# Allegro board LT8619C_HDMI_to_RGB_HV2_3.brd
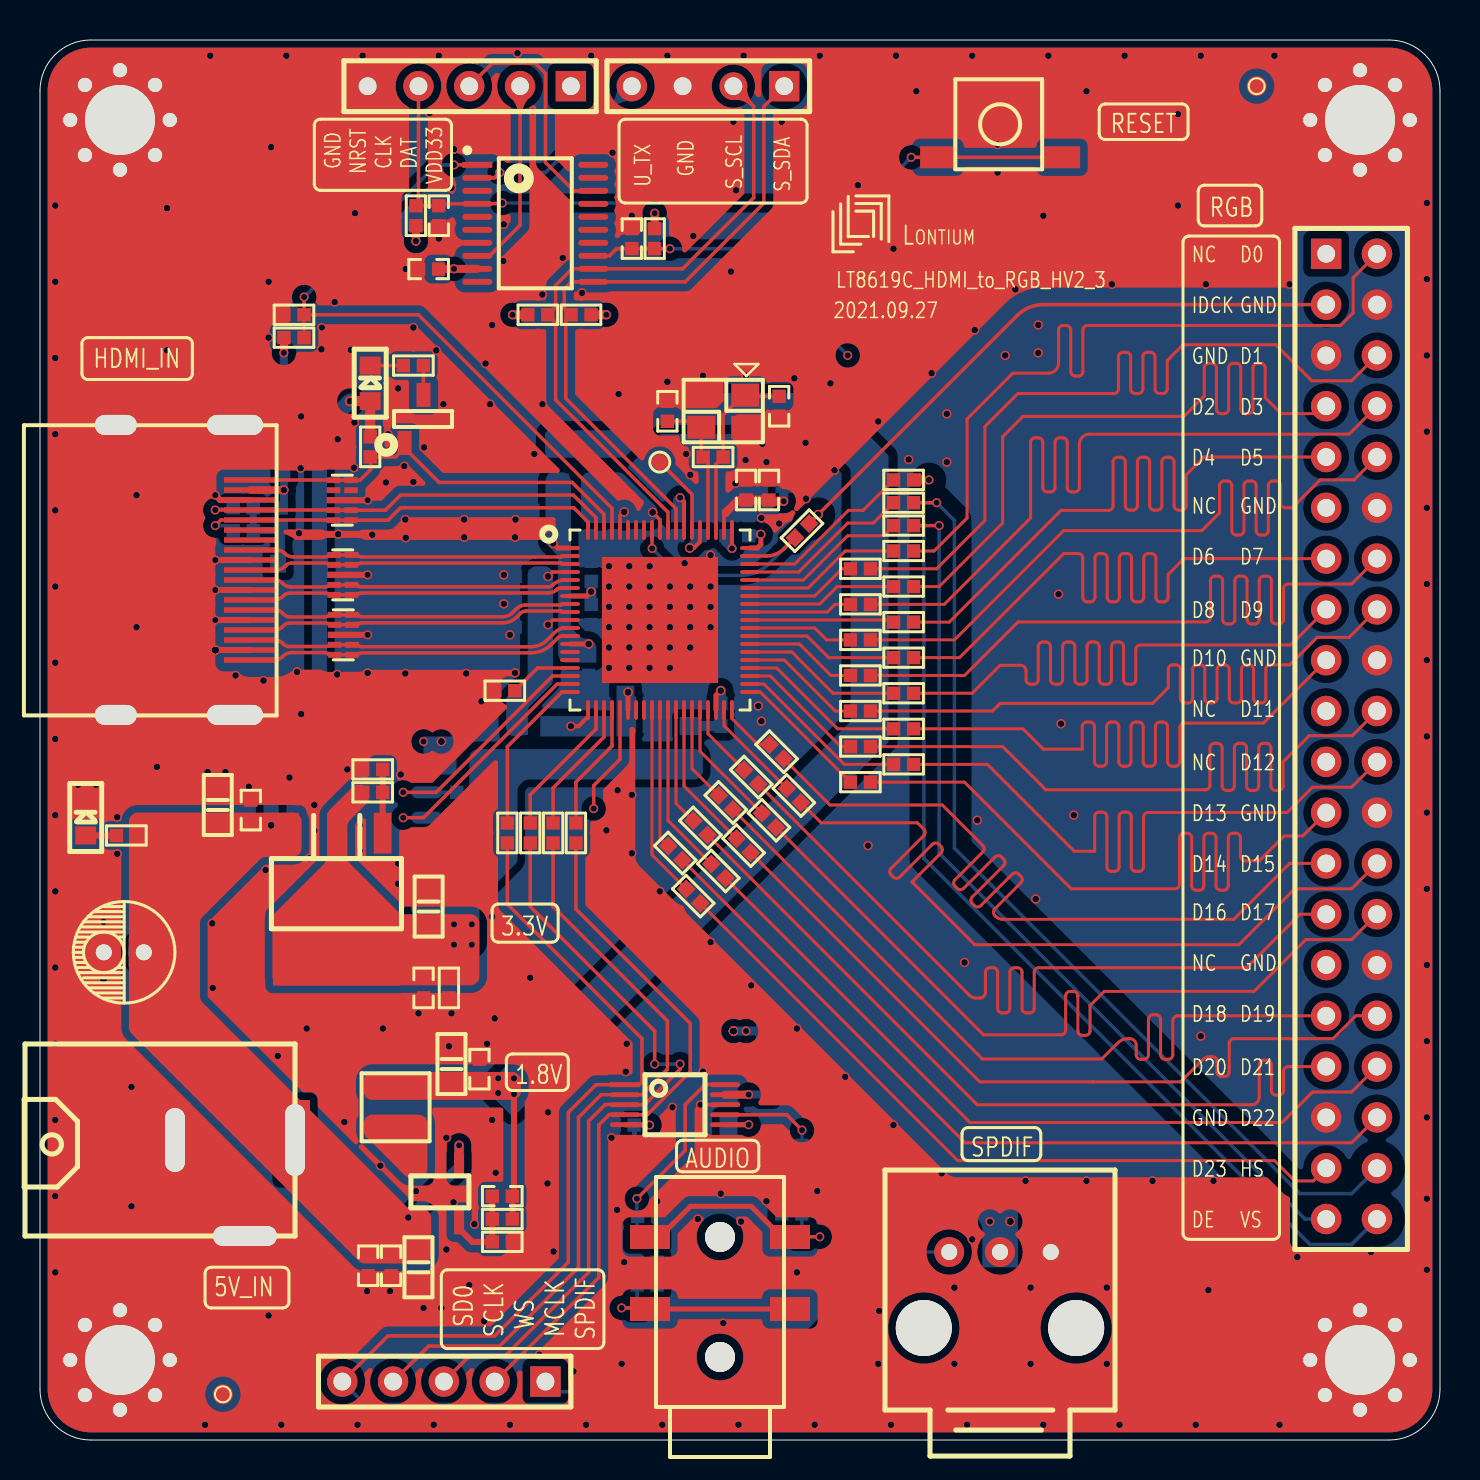
[diagram p0: board, top side]
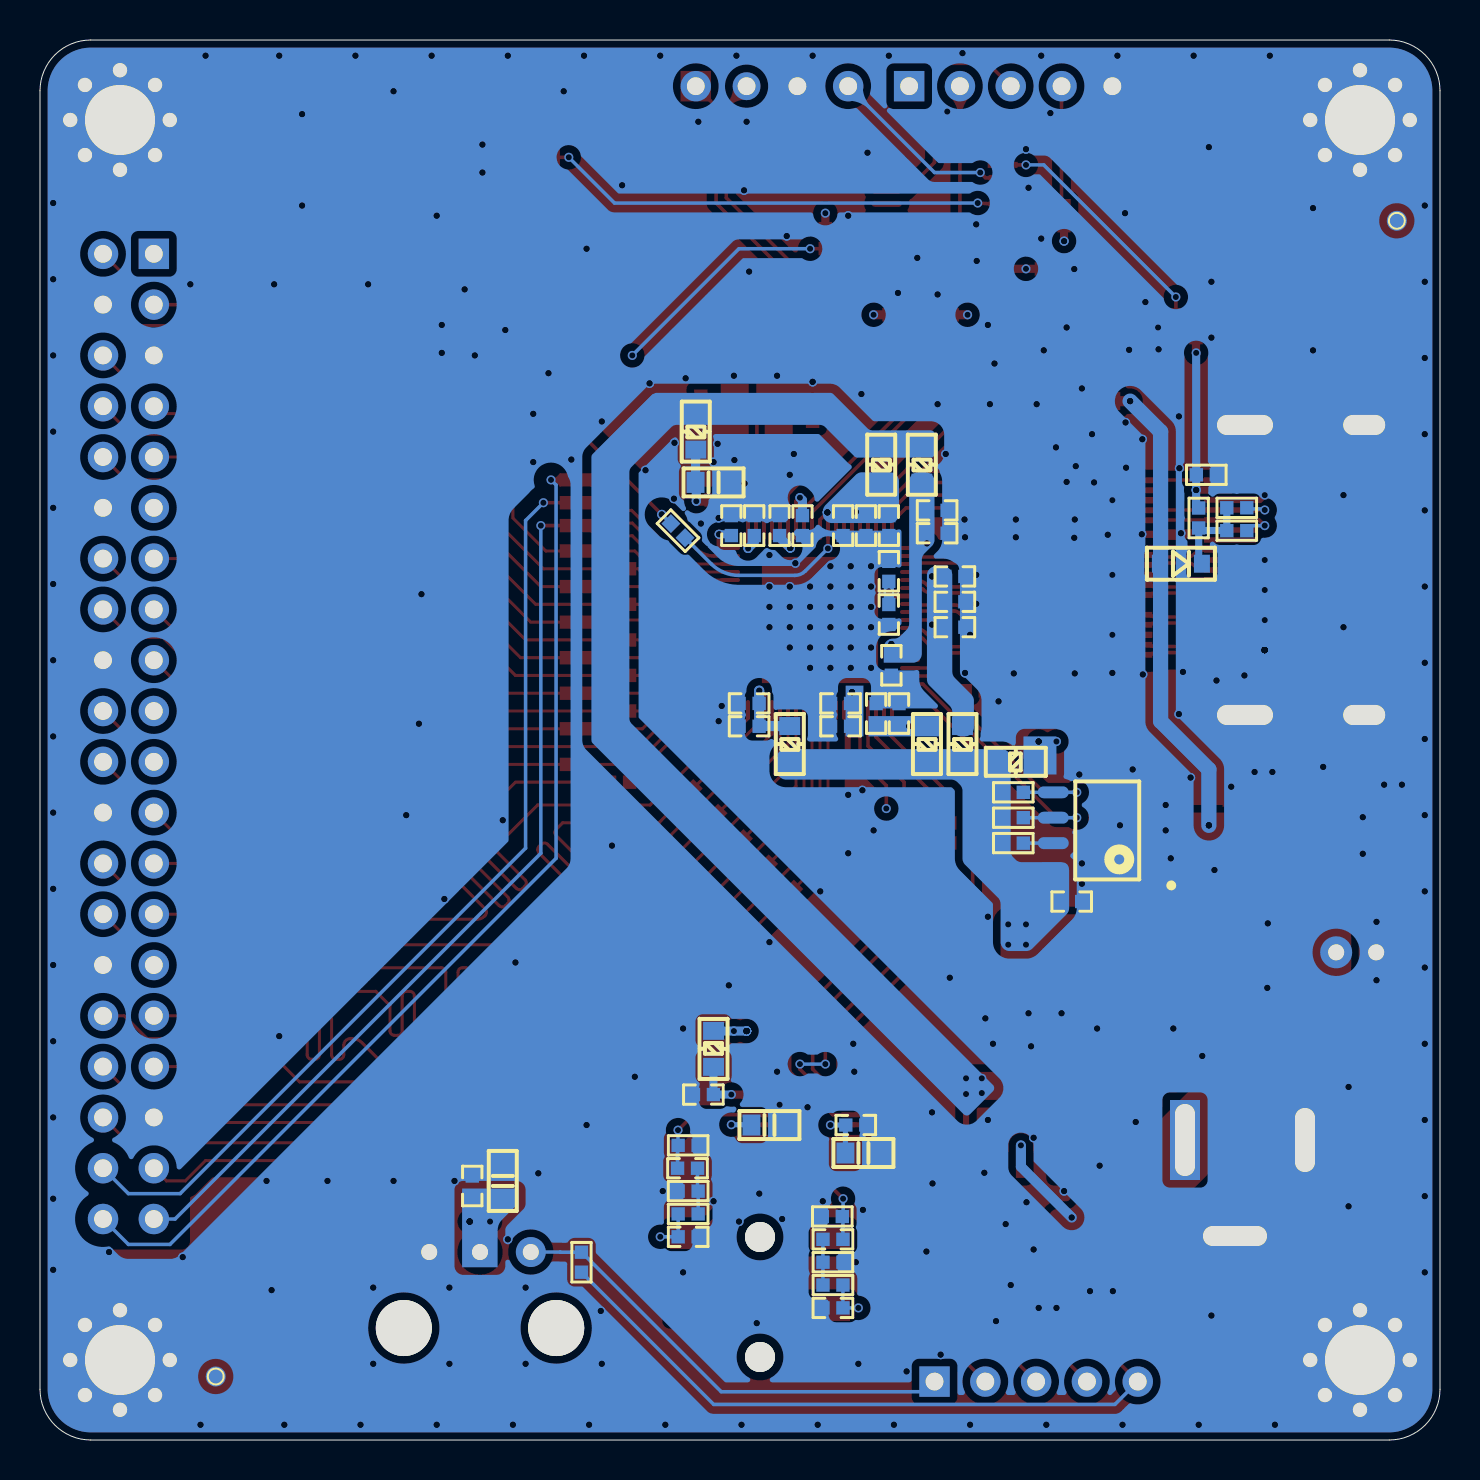
[diagram p1: board, bottom side, seen from below]

Outline 70 x 70 mm; copper layers: TOP, GND, POWER, BOTTOM. Coordinates in mm from the lower left corner of the outline.
Outline path: 0,67.46 arc(0.74,69.26) 2.54,70 67.46,70 arc(69.26,69.26) 70,67.46 70,2.54 arc(69.26,0.74) 67.46,0 2.54,0 arc(0.74,0.74) 0,2.54 0,67.46

## Design rules (mm)
net group D1: nets RX_D2+ RX_D2-
net group D2: nets RX_D1+ RX_D1-
net group D3: nets RX_D0+ RX_D0-
net group D4: nets RX_CLK+ RX_CLK-

## Placement (name value [footprint] x y rotation side)
C1  .10  [0402-C]  31.37 51.44 90 top
C2  .10  [0402-C]  36.96 51.69 270 top
C5  .10  [0402-C]  29.59 60.07 90 top
C6  .10  [0402-C]  18.41 26.92 0 bottom
C7  .10  [0402-C]  30.35 10.03 180 bottom
C8  .10  [0402-C]  30.35 6.6 180 bottom
C9  .10  [0603-C]  28.83 14.35 0 bottom
C10  .10  [0402-C]  29.21 15.75 0 bottom
C11  .10  [0603-C]  33.53 15.75 0 bottom
C12  .10  [0402-C]  37.62 13.59 180 bottom
C13  .10  [0402-C]  19.94 61.21 270 top
C14  .10  [0402-C]  37.59 10.16 0 bottom
C16  .10  [0402-C]  19.43 58.55 180 top
C17  .10  [0603-C]  46.86 12.95 90 bottom
C18  .10  [0402-C]  48.39 12.7 90 bottom
C19  .10  [0402-C]  23.11 12.19 0 top
C20  .10  [0603-C]  19.43 26.67 90 top
C21  .10  [0402-C]  19.18 22.61 270 top
C22  .10  [0603-C]  18.92 8.64 270 top
C23  .10  [0402-C]  17.55 8.71 270 top
C24  .10  [0402-C]  16.41 8.71 270 top
C25  .10  [0402-C]  36.83 17.27 180 bottom
C26  .10  [0603-C]  20.57 18.8 90 top
C27  .10  [0603-C]  8.89 31.75 90 top
C28  .10  [0402-C]  10.54 31.5 90 top
C29  .10  [0402-C]  27.05 36.32 90 bottom
C30  .10  [0402-C]  28.19 36.32 90 bottom
C31  .10  [0402-C]  31.88 45.72 270 bottom
C32  .10  [0402-C]  34.54 36.83 0 bottom
C33  .10  [0402-C]  35.43 45.72 90 bottom
C34  .10  [0402-C]  34.54 35.69 0 bottom
C35  .10  [0402-C]  24.26 40.64 180 bottom
C36  .10  [0402-C]  24.26 41.91 180 bottom
C37  .10  [0402-C]  24.26 43.18 180 bottom
C38  .10  [0402-C]  27.56 41.27 270 bottom
C39  .10  [0402-C]  27.56 43.43 90 bottom
C40  .10  [0402-C]  33.02 45.72 90 bottom
C41  .10  [0402-C]  34.29 45.72 90 bottom
C42  .10  [0402-C]  29.97 36.83 0 bottom
C43  .10  [0402-C]  27.56 45.72 270 bottom
C44  .10  [0402-C]  28.7 45.72 270 bottom
C45  .10  [0402-C]  29.97 35.69 0 bottom
C46  .10  [0402-C]  29.84 45.72 270 bottom
C47  .10  [0402-C]  25.15 45.34 180 bottom
C48  .10  [0402-C]  27.43 38.73 270 bottom
C49  .10  [0402-C]  25.15 46.48 180 bottom
C50  .10  [0603-C]  36.32 47.88 180 bottom
C51  .10  [0402-C]  35.31 47.5 90 top
C52  .10  [0402-C]  36.45 47.5 90 top
C53  .10  [0402-C]  21.97 18.54 90 top
CE1  .10  [CD5-2]  4.19 24.38 180 top
CN1  -  [HDMI_TYPEA_FEMAL_SMD]  10.5 43.5 270 top
CN2  -  [PHONEJACK_STEREO]  34 1.65 90 top
CN3  -  [OPTICAL_T]  48 9.4 0 top
CN4  -  [DC005]  6.75 15 0 top
D1  .10  [SOD-323]  12.95 43.81 180 bottom
D2  .10  [0603-LED_SMD]  16.51 52.83 90 top
FB3  .10  [0603-FB]  25.65 34.8 90 bottom
FB4  .10  [0603-FB]  27.94 48.77 90 bottom
FB5  .10  [0603-FB]  23.88 34.8 90 bottom
FB6  .10  [0603-FB]  21.21 33.91 180 bottom
FB7  .10  [0603-FB]  25.91 48.77 90 bottom
FB8  .10  [0603-FB]  32.51 34.8 90 bottom
FB9  .10  [0603-FB]  37.21 50.42 90 bottom
FB10  .10  [0603-FB]  36.32 19.56 270 bottom
H1  -  [HOLE3_6_PT]  4 4 0 top
H2  -  [HOLE3_6_PT]  4 66 0 top
H3  -  [HOLE3_6_PT]  66 66 0 top
H4  -  [HOLE3_6_PT]  66 4 90 top
J1  -  [CON20X2X254MM]  64.31 59.31 270 top
J3  -  [CON5X1X254MM]  26.54 67.69 180 top
J4  -  [CON4X1X254MM]  37.21 67.69 180 top
J5  -  [CON5X1X254MM]  25.27 2.92 180 top
K1  -  [BUTTON_SMD]  48.01 65.79 90 top
L1  .10  [CD3015]  17.78 16.64 90 top
LED1  .10  [0603-LED_SMD]  2.29 31.11 90 top
P1  -  [TP0_6MM]  60.83 67.69 0 top
P2  -  [TP0_6MM]  2.16 60.96 180 bottom
P3  -  [TP0_6MM]  9.14 2.29 0 top
P4  -  [TP0_6MM]  61.21 3.17 180 bottom
Q1  -  [SI2302_SOT23]  19.18 51.05 90 top
R1  .10  [0402-R]  12.06 46.1 270 bottom
R3  .10  [0402-R]  33.66 49.15 0 top
R4  .10  [0402-R]  38.1 45.47 225 bottom
R5  .10  [0402-R]  10.16 45.47 180 bottom
R6  .10  [0402-R]  10.16 46.61 180 bottom
R7  .10  [0402-R]  16.51 49.66 270 top
R8  .10  [0402-R]  18.67 53.72 180 top
R24  .10  [0402-R]  12.7 55.12 0 top
R28  .10  [0402-R]  38.1 45.47 225 top
R29  .10  [0402-R]  43.18 48.01 180 top
R30  .10  [0402-R]  43.18 46.86 180 top
R31  .10  [0402-R]  43.18 45.72 180 top
R32  .10  [0402-R]  43.18 44.45 180 top
R33  .10  [0402-R]  41.02 43.56 180 top
R34  .10  [0402-R]  12.7 56.26 180 top
R35  .10  [0402-R]  43.18 42.67 180 top
R36  .10  [0402-R]  41.02 41.78 180 top
R37  .10  [0402-R]  43.18 40.89 180 top
R38  .10  [0402-R]  41.02 40.01 180 top
R39  .10  [0402-R]  43.18 39.12 180 top
R40  .10  [0402-R]  41.02 38.23 180 top
R41  .10  [0402-R]  43.18 37.34 180 top
R42  .10  [0402-R]  41.02 36.45 180 top
R43  .10  [0402-R]  23.24 37.47 0 top
R44  .10  [0402-R]  43.18 35.56 180 top
R45  .10  [0402-R]  41.02 34.67 180 top
R46  .10  [0402-R]  43.18 33.78 180 top
R48  .10  [0402-R]  41.02 32.89 180 top
R50  .10  [0402-R]  24.51 30.35 270 top
R51  .10  [0402-R]  25.65 30.35 270 top
R52  .10  [0402-R]  26.8 30.35 270 top
R55  .10  [0402-R]  32.66 27.19 315 top
R56  .10  [0402-R]  31.76 29.35 315 top
R57  .10  [0402-R]  33.92 28.45 315 top
R58  .10  [0402-R]  33.02 30.61 315 top
R59  .10  [0402-R]  35.18 29.72 315 top
R60  .10  [0402-R]  34.29 31.88 315 top
R61  .10  [0402-R]  36.45 30.99 315 top
R62  .10  [0402-R]  35.56 33.15 315 top
R63  .10  [0402-R]  37.69 32.22 315 top
R64  .10  [0402-R]  36.83 34.42 315 top
R65  .10  [0402-R]  30.73 60.07 270 top
R66  .10  [0402-R]  30.35 7.75 180 bottom
R67  .10  [0402-R]  30.39 11.18 180 bottom
R68  .10  [0402-R]  30.35 8.89 0 bottom
R69  .10  [0402-R]  21.34 29.84 180 bottom
R70  .10  [0402-R]  21.34 31.11 180 bottom
R71  .10  [0402-R]  21.34 32.38 180 bottom
R73  .10  [0402-R]  24.89 56.26 0 top
R74  .10  [0402-R]  27.05 56.26 180 top
R75  .10  [0402-R]  18.8 61.21 90 top
R76  .10  [0402-R]  37.59 11.3 0 bottom
R77  .10  [0402-R]  37.59 14.73 0 bottom
R78  .10  [0402-R]  37.59 12.45 180 bottom
R84  .10  [0402-R]  4.32 30.23 180 top
R85  .10  [0402-R]  20.45 22.61 270 top
R86  .10  [0402-R]  16.64 32.38 0 top
R87  .10  [0402-R]  23.11 11.05 0 top
R88  .10  [0402-R]  23.11 9.91 0 top
R89  .10  [0402-R]  16.64 33.53 180 top
R90  .10  [0402-R]  23.37 30.35 270 top
R91  .10  [0402-R]  42.93 8.89 270 bottom
R92  .10  [0402-R]  11.68 48.26 180 bottom
T1  -  [RCLAMP0524P]  15.16 40.26 270 top
T5  -  [RCLAMP0524P]  15.14 43.26 270 top
T6  -  [RCLAMP0524P]  15.11 46.99 270 top
TP1  -  [TP1]  30.99 48.9 0 top
U1  -  [LT8619B_QFN76_EPAD]  31 41 0 top
U2  -  [CS4344_TSSOP10]  31.75 16.76 270 top
U3  -  [AT24C08_SOIC8]  16.64 30.48 0 bottom
U4  -  [STM8S103_TSSOP20]  24.77 60.83 0 top
U5  -  [TD6810_SOT23-5]  20.95 13.72 180 top
U6  -  [AMS1117_ADJ_SOT-223_4]  17.14 30.35 180 top
Y1  -  [CRY_3225]  34.16 51.44 0 top

## Library data of the parts
C1 C2 C5-C8 C10 C12-C14 C16 C18 C19 C21 C23-C25 C28-C49 C51-C53 = 0402-C
C9 C11 C17 C20 C22 C26 C27 C50 = 0603-C
CE1 = CD5-2
CN1 = HDMI_TYPEA_FEMAL_SMD
CN2 = PHONEJACK_STEREO
CN3 = OPTICAL_T
CN4 = DC005
D1 = SOD-323
D2 LED1 = 0603-LED_SMD
FB3-FB10 = 0603-FB
H1-H4 = HOLE3_6_PT
J1 = CON20X2X254MM
J3 J5 = CON5X1X254MM
J4 = CON4X1X254MM
K1 = BUTTON_SMD
L1 = CD3015
P1-P4 = TP0_6MM
Q1 = SI2302_SOT23: alternate symbols: (SI2302_SOT23,SI2302_SOT23A,SI2302_SOT23B)
R1 R3-R8 R24 R28-R46 R48 R50-R52 R55-R71 R73-R78 R84-R92 = 0402-R: alternate symbols: (0402-R,0402-RA,0402-RB,0402-RC,0402-RD,0402-RE,0402-RF,0402-RG,0402-RH)
T1 T5 T6 = RCLAMP0524P
TP1 = TP1
U1 = LT8619B_QFN76_EPAD
U2 = CS4344_TSSOP10
U3 = AT24C08_SOIC8
U4 = STM8S103_TSSOP20
U5 = TD6810_SOT23-5
U6 = AMS1117_ADJ_SOT-223_4
Y1 = CRY_3225

## Footprints (pads in the part's own frame, mm; a bottom-side part is the same pattern mirrored in y, then rotated)
0402-C
  rect 0.67x0.67 smd: 1(-0.5,0) 2(0.5,0)
0402-R
  rect 0.67x0.67 smd: 1(-0.5,0) 2(0.5,0)
0603-C
  rect 0.9x1.05 smd: 1(-0.9,0) 2(0.9,0)
0603-FB
  rect 0.9x1.05 smd: 1(-0.9,0) 2(0.9,0)
0603-LED_SMD
  rect 0.9x1.05 smd: A(-0.889,0) C(0.889,0)
AMS1117_ADJ_SOT-223_4
  rect 0.889x2.032 smd: 1(0.012,0.013) 2(2.323,0.013) 3(4.634,0.013)
  rect 6.35x3.556 smd: 4(2.323,5.855)
AT24C08_SOIC8
  oval 1.55x0.6 smd: 1(-2.7,1.905) 2(-2.7,0.635) 3(-2.7,-0.635) 4(-2.7,-1.905) 5(2.7,-1.905) 6(2.7,-0.635) 7(2.7,0.635) 8(2.7,1.905)
BUTTON_SMD
  rect 1.1x1.8 smd: 1(-1.65,3.1) 2(-1.65,-3.1) 3(1.65,-3.1) 4(1.65,3.1)
CD5-2
  rect 1.5x1.5 hole 0.8: 1(-1,0)
  round 1.5 hole 0.8: 2(1,0)
CD3015
  rect 1x3 smd: 1(-1,0) 2(1,0)
CON4X1X254MM
  rect 1.524x1.524 hole 0.889: 1(0,0)
  round 1.397 hole 0.889: 2(2.54,0) 3(5.08,0)
  round 1.524 hole 0.889: 4(7.62,0)
CON5X1X254MM
  rect 1.524x1.524 hole 0.889: 1(0,0)
  round 1.524 hole 0.889: 2(2.54,0) 3(5.08,0) 4(7.62,0) 5(10.16,0)
CON20X2X254MM
  rect 1.524x1.524 hole 0.889: 1(0,0)
  round 1.524 hole 0.889: 2(0,2.54) 3(2.54,0) 4(2.54,2.54) 5(5.08,0) 6(5.08,2.54) 7(7.62,0) 8(7.62,2.54) 9(10.16,0) 10(10.16,2.54) 11(12.7,0) 12(12.7,2.54) 13(15.24,0) 14(15.24,2.54) 15(17.78,0) 16(17.78,2.54) 17(20.32,0) 18(20.32,2.54) 19(22.86,0) 20(22.86,2.54) 21(25.4,0) 22(25.4,2.54) 23(27.94,0) 24(27.94,2.54) 25(30.48,0) 26(30.48,2.54) 27(33.02,0) 28(33.02,2.54) 29(35.56,0) 30(35.56,2.54) 31(38.1,0) 32(38.1,2.54) 33(40.64,0) 34(40.64,2.54) 35(43.18,0) 36(43.18,2.54) 37(45.72,0) 38(45.72,2.54) 39(48.26,0) 40(48.26,2.54)
CRY_3225
  rect 1.4x1.15 smd: 1(1.1,0.8) 2(-1.1,0.8) 3(-1.1,-0.8) 4(1.1,-0.8)
CS4344_TSSOP10
  rect 0.25x1.5 smd: 1(-1,-2.5)
  oval 0.25x1.5 smd: 2(-0.5,-2.5) 3(0,-2.5) 4(0.5,-2.5) 5(1,-2.5) 6(1,2.5) 7(0.5,2.5) 8(0,2.5) 9(-0.5,2.5) 10(-1,2.5)
DC005
  rect 3.8x1.5 hole 3.2x1: 1(3.5,-4.8)
  rect 1.5x4 hole 1x3.6: 2(6,0)
  rect 1.5x3.8 hole 1x3.2: 3(0,0)
HDMI_TYPEA_FEMAL_SMD
  rect 0.28x2.6 smd: 1(4.5,0) 2(4,0) 3(3.5,0) 4(3,0) 5(2.5,0) 6(2,0) 7(1.5,0) 8(1,0) 9(0.5,0) 10(0,0) 11(-0.5,0) 12(-1,0) 13(-1.5,0) 14(-2,0) 15(-2.5,0) 16(-3,0) 17(-3.5,0) 18(-4,0) 19(-4.5,0)
  oval 1.5x3.3 hole 1x2.8: 20(-7.252,-0.75) 21(7.248,-0.75)
  oval 1.5x2.7 hole 1x2.1: 22(-7.252,-6.71) 23(7.248,-6.71)
HOLE3_6_PT
  round 7 hole 3.5: 1(0,0)
  round 1.016 hole 0.711: 2(0,2.489) 3(-2.489,0) 4(2.489,0) 5(-1.753,-1.753) 6(1.753,-1.753) 7(1.753,1.753) 8(0,-2.489) 9(-1.753,1.753)
LT8619B_QFN76_EPAD
  oval 1x0.2 smd: 1(-4.5,3.6) 2(-4.5,3.2) 3(-4.5,2.8) 4(-4.5,2.4) 5(-4.5,2) 6(-4.5,1.6) 7(-4.5,1.2) 8(-4.5,0.8) 9(-4.5,0.4) 10(-4.5,0) 11(-4.5,-0.4) 12(-4.5,-0.8) 13(-4.5,-1.2) 14(-4.5,-1.6) 15(-4.5,-2) 16(-4.5,-2.4) 17(-4.5,-2.8) 18(-4.5,-3.2) 19(-4.5,-3.6) 39(4.5,-3.6) 40(4.5,-3.2) 41(4.5,-2.8) 42(4.5,-2.4) 43(4.5,-2) 44(4.5,-1.6) 45(4.5,-1.2) 46(4.5,-0.8) 47(4.5,-0.4) 48(4.5,0) 49(4.5,0.4) 50(4.5,0.8) 51(4.5,1.2) 52(4.5,1.6) 53(4.5,2) 54(4.5,2.4) 55(4.5,2.8) 56(4.5,3.2) 57(4.5,3.6)
  oval 0.2x1 smd: 20(-3.6,-4.5) 21(-3.2,-4.5) 22(-2.8,-4.5) 23(-2.4,-4.5) 24(-2,-4.5) 25(-1.6,-4.5) 26(-1.2,-4.5) 27(-0.8,-4.5) 28(-0.4,-4.5) 29(0,-4.5) 30(0.4,-4.5) 31(0.8,-4.5) 32(1.2,-4.5) 33(1.6,-4.5) 34(2,-4.5) 35(2.4,-4.5) 36(2.8,-4.5) 37(3.2,-4.5) 38(3.6,-4.5) 58(3.6,4.5) 59(3.2,4.5) 60(2.8,4.5) 61(2.4,4.5) 62(2,4.5) 63(1.6,4.5) 64(1.2,4.5) 65(0.8,4.5) 66(0.4,4.5) 67(0,4.5) 68(-0.4,4.5) 69(-0.8,4.5) 70(-1.2,4.5) 71(-1.6,4.5) 72(-2,4.5) 73(-2.4,4.5) 74(-2.8,4.5) 75(-3.2,4.5) 76(-3.6,4.5)
  rect 5.81x6.31 smd: 77(0,0)
OPTICAL_T
  round 2.8 hole 2.8 unplated: (-3.81,-3.8) (3.81,-3.8)
  round 1.5 hole 0.8: 1(2.54,0) 2(0,0) 3(-2.54,0)
PHONEJACK_STEREO
  rect 1.2x2 smd: 1(8.5,-3.5) 2(8.5,3.5) 3(4.9,-3.5) 4(4.9,3.5) 5(1.7,-3.5) 6(1.7,3.5)
  round 1.5 hole 1.5: 7(2.5,0) 8(8.5,0)
RCLAMP0524P
  rect 0.3x0.675 smd: 1(1,0.437) 2(0.5,0.437) 4(-0.5,0.437) 5(-1,0.437) 6(-1,-0.437) 7(-0.5,-0.437) 8(0,-0.437) 9(0.5,-0.437) 10(1,-0.437)
  rect 0.3x1.55 smd: 3(0,0)
SI2302_SOT23
  rect 1.2x0.7 smd: D(1.2,0) G(-1.2,0.95) S(-1.2,-0.95)
SOD-323
  rect 0.8x0.9 smd: 1(-1.05,0) 2(1.05,0)
STM8S103_TSSOP20
  rect 1.5x0.3 smd: 1(-2.9,2.925)
  oval 1.5x0.3 smd: 2(-2.9,2.275) 3(-2.9,1.625) 4(-2.9,0.975) 5(-2.9,0.325) 6(-2.9,-0.325) 7(-2.9,-0.975) 8(-2.9,-1.625) 9(-2.9,-2.275) 10(-2.9,-2.925) 11(2.9,-2.925) 12(2.9,-2.275) 13(2.9,-1.625) 14(2.9,-0.975) 15(2.9,-0.325) 16(2.9,0.325) 17(2.9,0.975) 18(2.9,1.625) 19(2.9,2.275) 20(2.9,2.925)
TD6810_SOT23-5
  rect 0.5x1.22 smd: 1(0,0) 2(0.95,0) 3(1.9,0) 4(1.9,2.82) 5(0,2.82)
TP0_6MM
  round 1 smd: 1(0,0)
TP1
  round 0.8 smd: 1(0,0)

## Nets
5V: C22.1 C23.1 C24.1 C27.1 C28.1 CE1.1 CN4.2 D1.1 D2.A R7.1 R84.1 U5.1 U5.4 U6.3
GND: C1.2 C2.2 C5.2 C6.1 C8.1 C9.1 C10.1 C11.1 C13.2 C14.1 C16.2 C17.2 C18.2 C20.2 C21.2 C22.2 C23.2 C24.2 C25.1 C26.2 C27.2 C28.2 C29.2 C30.2 C31.2 C32.2 C33.2 C34.2 C35.2 C36.2 C37.2 C38.2 C39.2 C40.2 C41.2 C42.2 C43.2 C44.2 C45.2 C46.2 C47.2 C48.2 C49.2 C50.2 C51.2 C52.2 C53.2 CE1.2 CN1.2 CN1.5 CN1.8 CN1.11 CN1.17 CN1.20 CN1.21 CN1.22 CN1.23 CN2.5 CN2.6 CN3.1 CN4.1 CN4.3 H1.1 H1.2 H1.3 H1.4 H1.5 H1.6 H1.7 H1.8 H1.9 H2.1 H2.2 H2.3 H2.4 H2.5 H2.6 H2.7 H2.8 H2.9 H3.1 H3.2 H3.3 H3.4 H3.5 H3.6 H3.7 H3.8 H3.9 H4.1 H4.2 H4.3 H4.4 H4.5 H4.6 H4.7 H4.8 H4.9 J1.4 J1.5 J1.12 J1.18 J1.24 J1.30 J1.35 J3.5 J4.3 K1.3 K1.4 LED1.C Q1.S R34.2 R43.1 R67.1 R68.1 R77.1 R78.1 R85.2 R88.2 R89.2 R92.2 T1.3 T1.8 T5.3 T5.8 T6.3 T6.8 U1.77 U2.8 U3.1 U3.2 U3.3 U3.4 U4.7 U5.2 Y1.2 Y1.4
PVCC18: C50.1 C51.1 C52.1 FB9.1 U1.59
VCC33: C29.1 C30.1 C31.1 FB3.2 U1.20 U1.64
VCC33_TTL: C32.1 C33.1 C34.1 FB8.2 U1.36 U1.57
VCC33_VTERM: C35.1 C36.1 C37.1 FB5.2 U1.4 U1.10
VCCA18: C47.1 C48.1 C49.1 FB7.1 U1.1 U1.13
VCCA33: C38.1 C39.1 C40.1 FB6.2 U1.7 U1.62
VDD18: C41.1 C42.1 C43.1 C44.1 C45.1 C46.1 FB4.1 U1.25 U1.58 U1.67 U1.72
VDD33: C6.2 C16.1 C17.1 C18.1 C20.1 C21.1 CN3.2 FB3.1 FB5.1 FB6.1 FB8.1 FB10.1 J3.1 R65.1 R69.1 R70.1 R71.1 R73.1 R74.1 R75.1 R85.1 R86.1 U3.8 U4.9 U6.2 U6.4
AUDIO_3V3: C25.2 FB10.2 U2.9
AUDIO_L: C14.2 CN2.1 CN2.2 R76.2
AUDIO_R: C8.2 CN2.3 CN2.4 R66.2
D0: J1.2 R32.1
D1: J1.6 R33.1
D2: J1.7 R35.1
D3: J1.8 R36.1
D4: J1.9 R37.1
D5: J1.10 R38.1
D6: J1.13 R39.1
D7: J1.14 R40.1
D8: J1.15 R41.1
D9: J1.16 R42.1
D10: J1.17 R44.1
D11: J1.20 R45.1
D12: J1.22 R46.1
D13: J1.23 R48.1
D14: J1.25 R64.2
D15: J1.26 R63.2
D16: J1.27 R62.2
D17: J1.28 R61.2
D18: J1.31 R60.2
D19: J1.32 R59.2
D20: J1.33 R58.2
D21: J1.34 R57.2
D22: J1.36 R56.2
D23: J1.37 R55.2
DE: J1.39 R31.1
GPIO15: TP1.1 U1.63
HDCP_M_SCL: R70.2 U1.18 U3.6
HDCP_M_SDA: R71.2 U1.17 U3.5
HDMI_5V: CN1.18 R1.1 R24.1 R92.1
HDMI_5V_DET: R24.2 R34.1 U1.73 U4.1
HS: J1.38 R30.1
IIS_MCLK: J5.2 R52.2 U2.4
IIS_SCLK: J5.4 R51.2 U2.2
IIS_SD0: J5.5 R90.2 R91.2 U2.1
IIS_WS: J5.3 R50.2 U2.3
NRST: C13.1 J3.4 K1.1 K1.2 R75.2 U4.4
PCLK: J1.3 R4.1 R28.1
RESET_N: C5.1 R65.2 U1.24 U4.13
RX_CLK+: CN1.10 T5.4 T5.7 U1.3
RX_CLK-: CN1.12 T5.5 T5.6 U1.2
RX_D0+: CN1.7 T5.1 T5.10 U1.6
RX_D0-: CN1.9 T5.2 T5.9 U1.5
RX_D1+: CN1.4 T1.4 T1.7 U1.9
RX_D1-: CN1.6 T1.5 T1.6 U1.8
RX_D2+: CN1.1 T1.1 T1.10 U1.12
RX_D2-: CN1.3 T1.2 T1.9 U1.11
RX_HPD: CN1.19 Q1.G R7.2 T6.5 T6.6 U1.74
RX_SCL: CN1.15 R5.2 T6.1 T6.10 U1.76
RX_SDA: CN1.16 R6.2 T6.2 T6.9 U1.75
S_SCL: J4.2 R73.2 U1.66 U4.12
S_SDA: J4.1 R74.2 U1.65 U4.11
SPDIF: CN3.3 J5.1 R91.1
SWIM/TICECLK: J3.3 U4.18
TICEDAT: J3.2 U4.8
UART_TX1: J4.4 U4.2
VS: J1.40 R29.1
N10971009: D1.2 R1.2 R5.1 R6.1
N10976855: Q1.D R8.1
N10992551: R31.2 U1.53
N10992553: R32.2 U1.52
N10992555: R33.2 U1.51
N10992557: R35.2 U1.50
N10992559: R36.2 U1.49
N10992561: R37.2 U1.48
N10992563: R38.2 U1.47
N10992565: R39.2 U1.46
N10992567: R40.2 U1.45
N10992569: R41.2 U1.44
N10992571: R42.2 U1.43
N10992573: R44.2 U1.42
N10992575: R45.2 U1.41
N10992577: R46.2 U1.40
N10992579: R48.2 U1.39
N10992581: R28.2 U1.56
N10992583: R29.2 U1.55
N10992585: R30.2 U1.54
N10993307: R64.1 U1.38
N10993311: R63.1 U1.37
N10993315: R62.1 U1.35
N10993319: R61.1 U1.34
N10993323: R60.1 U1.33
N10993327: R59.1 U1.32
N10993331: R58.1 U1.31
N10993335: R57.1 U1.30
N10993339: R56.1 U1.29
N10993343: R55.1 U1.28
N10993355: R52.1 U1.23
N10993359: R51.1 U1.22
N10993363: R50.1 U1.21
N10995773: R43.2 U1.16
N10999972: C2.1 R3.2 U1.60 Y1.1
N10999976: C1.1 R3.1 U1.61 Y1.3
N11001622: R4.2 U1.68
N11041252: C9.2 C10.2 U2.5
N11042157: C11.2 U2.6
N11043386: C7.1 R66.1 R68.2
N11043400: C7.2 R67.2 U2.10
N11044324: C12.1 R77.2 U2.7
N11044331: C12.2 R76.1 R78.2
N11063456: R69.2 U3.7
N11065466: LED1.A R84.2
N11066120: R86.2 R89.1 U6.1
N11068291: L1.1 U5.3
N11068295: C19.1 R87.1 R88.1 U5.5
N11068321: C19.2 C26.1 C53.1 FB4.2 FB7.2 FB9.2 L1.2 R87.2
N12357876: R90.1 U1.19
N109760781: D2.C R8.2

Pads without a net: CN1 13 14; CN2 7 8; J1 1 11 19 21 29; P1 1; P2 1; P3 1; P4 1; T6 4 7; U1 14 15 26 27 69 70 71; U4 3 5 6 10 14 15 16 17 19 20

## Via types
v1: diameter 0.457, hole 0.305, TOP to BOTTOM, 819 vias

## Routing (per net, layer and track width the routed paths; a pad name or vN(x,y) marks a point on that pad's centre or on a via; arc(x,y) is an arc through that point)
5V: length 31.3
  TOP w0.457: v1(20.95,14.73) U5.1
  TOP w0.508: v1(15.49,51.94) D2.A R7.1
  BOTTOM w0.508: v1(20.95,14.73) 20.95,13.67 v1(18.41,11.13)
  BOTTOM w0.762: v1(15.49,51.94) 13.97,50.42 13.97,35.94 11.56,33.53 v1(11.56,30.73)
GND: length 13.8
  TOP w0.178: 10.49,46.99 CN1.17 ; v1(33.02,16.76) U2.8 ; v1(8.76,39.5) 8.76,39.5
  TOP w0.305: 8.76,39.5 CN1.2 ; v1(8.76,41) 8.76,41 CN1.5 ; v1(16.38,40.26) T1.3 ; CN1.17 9.01,47 v1(8.76,47.24) ; v1(16.38,46.99) T6.3 ; v1(8.76,44) CN1.11 ; v1(8.76,42.5) CN1.8 ; v1(16.38,43.26) T5.3
  vias: v1(0.76,61.72) v1(0.76,61.72) v1(0.76,57.91) v1(0.76,57.91) v1(0.76,54.1) v1(0.76,54.1) v1(0.76,50.29) v1(0.76,50.29) v1(0.76,46.48) v1(0.76,46.48) v1(0.76,42.67) v1(0.76,42.67) v1(0.76,38.86) v1(0.76,38.86) v1(0.76,35.05) v1(0.76,35.05) v1(0.76,31.24) v1(0.76,31.24) v1(0.76,27.43) v1(0.76,27.43) v1(0.76,23.62) v1(0.76,23.62) v1(0.76,19.81) v1(0.76,19.81) v1(0.76,16) v1(0.76,16) v1(0.76,12.19) v1(0.76,12.19) v1(0.76,8.38) v1(0.76,8.38) v1(1.91,32.77) v1(1.91,32.77) v1(2.79,32.77) v1(2.79,32.77) v1(3.17,25.91) v1(3.17,25.91) v1(3.17,22.99) v1(3.17,22.99) v1(3.86,31.14) v1(3.86,31.14) v1(3.86,29.31) v1(3.86,29.31) v1(4.57,17.65) v1(4.57,17.65) v1(4.57,11.68) v1(4.57,11.68) v1(4.83,47.24) v1(4.83,47.24) v1(4.83,40.64) v1(4.83,40.64) v1(5.84,33.66) v1(5.84,33.66) v1(6.35,61.59) v1(6.35,61.59) v1(6.35,54.48) v1(6.35,54.48) v1(8.26,0.76) v1(8.26,0.76) v1(8.38,33.4) v1(8.38,33.4) v1(8.51,69.22) v1(8.51,69.22) v1(8.61,25.83) v1(8.61,25.83) v1(8.64,22.61) v1(8.64,22.61) v1(9.27,33.4) v1(9.27,33.4) v1(9.78,38.23) v1(9.78,38.23) v1(10.44,32.66) v1(10.44,32.66) v1(11.18,37.97) v1(11.18,37.97) v1(11.28,28.5) v1(11.28,28.5) v1(11.43,57.91) v1(11.43,57.91) v1(11.43,55.12) v1(11.43,55.12) v1(11.43,6.22) v1(11.43,6.22) v1(11.56,64.64) v1(11.56,64.64) v1(11.89,19.2) v1(11.89,19.2) v1(12.06,0.76) v1(12.06,0.76) v1(12.32,69.22) v1(12.32,69.22) v1(12.47,33.12) v1(12.47,33.12) v1(12.85,38.4) v1(12.85,38.4) v1(13.03,48.59) v1(13.03,48.59) v1(12.95,45.34) v1(12.95,45.34) v1(13.06,51.18) v1(13.06,51.18) v1(13.06,36.3) v1(13.06,36.3) v1(13.34,20.57) v1(13.34,20.57) v1(13.46,29.08) v1(13.46,29.08) v1(13.72,31.75) v1(13.72,31.75) v1(13.72,30.48) v1(13.72,30.48) v1(14.1,55.63) v1(14.07,54.53) v1(14.07,54.53) v1(14.73,56.9) v1(14.73,56.9) v1(14.88,50.04) v1(14.88,50.04) v1(14.91,45.29) v1(14.91,45.29) v1(14.86,38.28) v1(14.86,38.28) v1(15.21,15.9) v1(15.21,15.9) v1(15.37,33.53) v1(15.37,33.53) v1(15.54,54.51) v1(15.54,54.51) v1(15.75,61.34) v1(15.75,61.34) v1(15.72,50.88) v1(15.72,50.88) v1(15.7,48.62) v1(15.7,48.62) v1(15.88,0.76) v1(15.88,0.76) v1(16,30.73) v1(16,30.73) v1(16,29.46) v1(16,29.46) v1(16.13,69.22) v1(16.13,69.22) v1(16.38,38.35) v1(16.38,38.35) v1(16.36,7.44) v1(16.36,7.44) v1(16.61,45.26) v1(16.61,45.26) v1(17.02,13.72) v1(17.02,13.72) v1(17.14,20.57) v1(17.14,20.57) v1(17.3,47.88) v1(17.3,47.88) v1(17.4,50.29) v1(17.4,50.29) v1(17.5,7.44) v1(17.5,7.44) v1(17.91,52.58) v1(17.91,52.58) v1(17.91,28.83) v1(17.91,28.83) v1(17.91,27.81) v1(17.91,27.81) v1(18.03,33.27) v1(18.03,33.27) v1(18.21,48.69) v1(18.21,48.69) v1(18.29,58.55) v1(18.29,58.55) v1(18.26,46.02) v1(18.26,46.02) v1(18.29,45.11) v1(18.29,45.11) v1(18.26,38.33) v1(18.26,38.33) v1(18.67,55.63) v1(18.67,55.63) v1(18.67,47.9) v1(18.67,47.9) v1(18.8,12.45) v1(18.8,12.45) v1(18.92,21.34) v1(18.92,21.34) v1(19.2,49.63) v1(19.2,49.63) v1(19.18,6.6) v1(19.18,6.6) v1(19.48,66.34) v1(19.48,66.34) v1(19.68,0.76) v1(19.68,0.76) v1(19.81,54.48) v1(19.81,54.48) v1(19.94,69.22) v1(19.94,69.22) v1(19.94,60.07) v1(19.94,60.07) v1(20.07,6.6) v1(20.07,6.6) v1(20.17,51.79) v1(20.17,51.79) v1(20.32,15.11) v1(20.32,15.11) v1(20.32,9.53) v1(20.32,9.53) v1(20.45,19.68) v1(20.45,19.68) v1(20.57,62.61) v1(20.57,62.61) v1(20.57,21.34) v1(20.57,21.34) v1(20.7,64.54) v1(20.7,64.54) v1(20.68,11.89) v1(20.68,11.89) v1(21.21,46.02) v1(21.21,46.02) v1(21.21,45.14) v1(21.21,45.14) v1(21.31,38.33) v1(21.31,38.33) v1(21.46,7.75) v1(21.46,7.75) v1(21.72,10.79) v1(21.72,10.79) v1(22.07,36.93) v1(22.07,36.93) v1(22.2,5.94) v1(22.2,5.94) v1(22.28,53.82) v1(22.28,53.82) v1(22.35,19.81) v1(22.35,19.81) v1(22.5,51.79) v1(22.5,51.79) v1(22.61,55.75) v1(22.61,55.75) v1(22.61,26.16) v1(22.61,26.16) v1(22.61,16) v1(22.61,16) v1(22.73,21.08) v1(22.73,21.08) v1(22.78,13.36) v1(22.78,13.36) v1(23.19,60.78) v1(23.19,60.78) v1(23.16,58.95) v1(23.16,58.95) v1(23.19,43.26) v1(23.19,43.26) v1(23.19,41.81) v1(23.19,41.81) v1(23.5,40.26) v1(23.5,40.26) v1(23.5,0.76) v1(23.5,0.76) v1(23.75,45.14) v1(23.75,45.14) v1(23.75,38.35) v1(23.75,38.35) v1(23.77,46.02) v1(23.77,46.02) v1(23.88,69.34) v1(23.88,69.34) v1(24.51,23.11) v1(24.51,23.11) v1(24.64,66.42) v1(24.71,49.3) v1(24.71,49.3) v1(24.97,4.27) v1(24.97,4.27) v1(25.12,57.28) v1(25.12,57.28) v1(25.12,51.79) v1(25.12,51.79) v1(25.4,16.38) v1(25.4,16.38) v1(25.37,12.83) v1(25.37,12.83) v1(25.68,9.42) v1(25.68,9.42) v1(26.14,59.11) v1(26.14,59.11) v1(26.67,3.43) v1(26.67,3.43) v1(27.1,57.35) v1(27.1,57.35) v1(27.3,0.76) v1(27.3,0.76) v1(27.56,69.22) v1(27.56,69.22) v1(28.32,30.48) v1(28.32,30.48) v1(28.45,43.69) v1(28.45,43.69) v1(28.45,42.67) v1(28.45,42.67) v1(28.45,41.66) v1(28.45,41.66) v1(28.45,40.64) v1(28.45,40.64) v1(28.45,39.62) v1(28.45,39.62) v1(28.45,38.61) v1(28.45,38.61) v1(28.63,64.36) v1(28.63,64.36) v1(28.57,15.11) v1(28.57,15.11) v1(28.93,52.3) v1(28.93,52.3) v1(28.88,32.49) v1(28.88,32.49) v1(28.85,11.51) v1(28.85,11.51) v1(29.08,3.81) v1(29.08,3.81) v1(29.21,8.89) v1(29.21,8.89) v1(29.34,19.81) v1(29.34,19.81) v1(29.29,18.41) v1(29.29,18.41) v1(29.46,43.69) v1(29.46,43.69) v1(29.46,42.67) v1(29.46,42.67) v1(29.46,41.66) v1(29.46,41.66) v1(29.46,40.64) v1(29.46,40.64) v1(29.46,39.62) v1(29.46,39.62) v1(29.46,38.61) v1(29.46,38.61) v1(29.59,61.21) v1(29.59,61.21) v1(29.59,32.26) v1(29.59,32.26) v1(29.59,29.34) v1(29.59,29.34) v1(30.48,43.69) v1(30.48,43.69) v1(30.48,42.67) v1(30.48,42.67) v1(30.48,41.66) v1(30.48,41.66) v1(30.48,40.64) v1(30.48,40.64) v1(30.48,39.62) v1(30.48,39.62) v1(30.48,38.61) v1(30.48,38.61) v1(30.86,11.94) v1(30.86,11.94) v1(30.99,27.43) v1(30.99,27.43) v1(31.11,0.76) v1(31.11,0.76) v1(31.37,69.22) v1(31.37,69.22) v1(31.37,52.91) v1(31.37,52.91) v1(31.37,52.91) v1(31.5,42.67) v1(31.5,42.67) v1(31.5,41.66) v1(31.5,41.66) v1(31.5,40.64) v1(31.5,40.64) v1(31.5,39.62) v1(31.5,39.62) v1(31.5,38.61) v1(31.5,38.61) v1(31.62,16.64) v1(31.62,16.64) v1(32.23,43.84) v1(32.23,43.84) v1(32.31,49.3) v1(32.31,49.3) v1(32.51,48.26) v1(32.51,48.26) v1(32.51,42.67) v1(32.51,42.67) v1(32.51,41.66) v1(32.51,41.66) v1(32.51,40.64) v1(32.51,40.64) v1(32.51,39.62) v1(32.51,39.62) v1(32.66,60.2) v1(32.66,60.2) v1(32.89,11.05) v1(32.89,11.05) v1(33.15,53.21) v1(33.15,53.21) v1(33.15,18.41) v1(33.15,18.41) v1(33.53,44.25) v1(33.53,44.25) v1(33.53,42.67) v1(33.53,42.67) v1(33.53,41.66) v1(33.53,41.66) v1(33.53,40.64) v1(33.53,40.64) v1(33.53,24.89) v1(33.53,24.89) v1(34.04,12.32) v1(34.04,12.32) v1(34.16,5.84) v1(34.16,5.84) v1(34.54,58.42) v1(34.54,58.42) v1(34.67,65.91) v1(34.67,65.91) v1(34.8,62.48) v1(34.8,62.48) v1(34.77,47.83) v1(34.77,47.83) v1(34.92,0.76) v1(34.92,0.76) v1(35.05,10.92) v1(35.05,10.92) v1(35.18,69.22) v1(35.18,69.22) v1(35.31,53.21) v1(35.31,53.21) v1(35.28,49) v1(35.28,49) v1(35.56,22.73) v1(35.56,22.73) v1(35.92,36.7) v1(35.92,36.7) v1(36.12,49.81) v1(36.12,49.81) v1(36.07,46.1) v1(36.07,46.1) v1(36.07,35.94) v1(36.07,35.94) v1(36.32,48.9) v1(36.32,48.9) v1(36.32,11.94) v1(36.32,11.94) v1(36.96,45.82) v1(36.96,45.82) v1(37.08,65.91) v1(37.08,65.91) v1(37.72,53.09) v1(37.72,53.09) v1(37.85,20.57) v1(37.85,20.57) v1(37.85,8.38) v1(37.85,8.38) v1(38.28,49.86) v1(38.28,49.86) v1(38.3,47.07) v1(38.3,47.07) v1(38.73,0.76) v1(38.73,0.76) v1(38.86,12.45) v1(38.86,12.45) v1(38.99,69.22) v1(38.99,69.22) v1(39.52,52.83) v1(39.52,52.83) v1(39.73,48.49) v1(39.73,48.49) v1(40.26,18.16) v1(40.26,18.16) v1(40.89,62.74) v1(40.89,62.74) v1(41.4,29.72) v1(41.4,29.72) v1(41.91,50.93) v1(41.91,50.93) v1(41.91,3.81) v1(41.91,3.81) v1(41.96,6.45) v1(41.96,6.45) v1(42.55,0.76) v1(42.55,0.76) v1(42.67,59.56) v1(42.67,59.56) v1(42.67,15.75) v1(42.67,15.75) v1(42.8,69.22) v1(42.8,69.22) v1(43.43,49.02) v1(43.43,49.02) v1(43.81,67.44) v1(43.81,67.44) v1(44.58,53.34) v1(44.58,53.34) v1(45.09,13.34) v1(45.09,13.34) v1(45.34,51.31) v1(45.34,51.31) v1(45.34,48.9) v1(45.34,48.9) v1(45.72,7.62) v1(45.72,7.62) v1(45.72,3.81) v1(45.72,3.81) v1(46.23,23.88) v1(46.23,23.88) v1(46.35,0.76) v1(46.35,0.76) v1(46.61,69.22) v1(46.61,69.22) v1(46.61,10.03) v1(46.61,10.03) v1(46.74,55.5) v1(46.74,55.5) v1(46.86,30.99) v1(46.86,30.99) v1(47.88,64.77) v1(47.88,64.77) v1(47.88,63.37) v1(47.88,63.37) v1(48.26,54.23) v1(48.26,54.23) v1(48.77,57.53) v1(48.77,57.53) v1(49.28,12.95) v1(49.28,12.95) v1(49.53,7.62) v1(49.53,7.62) v1(49.53,3.81) v1(49.53,3.81) v1(49.78,27.05) v1(49.78,27.05) v1(49.91,55.75) v1(49.91,55.75) v1(49.91,54.36) v1(49.91,54.36) v1(50.16,61.21) v1(50.16,61.21) v1(50.16,0.76) v1(50.16,0.76) v1(50.42,69.22) v1(50.42,69.22) v1(50.93,42.29) v1(50.93,42.29) v1(51.05,35.81) v1(51.05,35.81) v1(51.69,31.24) v1(51.69,31.24) v1(52.32,67.44) v1(52.32,67.44) v1(52.32,12.95) v1(52.32,12.95) v1(53.34,7.62) v1(53.34,7.62) v1(53.34,3.81) v1(53.34,3.81) v1(53.59,57.78) v1(53.59,57.78) v1(53.98,0.76) v1(53.98,0.76) v1(54.23,69.22) v1(54.23,69.22) v1(55.63,12.95) v1(55.63,12.95) v1(56.9,66.29) v1(56.9,66.29) v1(56.9,61.72) v1(56.9,61.72) v1(57.78,0.76) v1(57.78,0.76) v1(58.04,69.22) v1(58.04,69.22) v1(58.04,20.19) v1(58.04,20.19) v1(58.29,57.78) v1(58.29,57.78) v1(58.42,7.49) v1(58.42,7.49) v1(58.67,12.95) v1(58.67,12.95) v1(61.72,69.22) v1(61.72,69.22) v1(61.98,0.76) v1(61.98,0.76) v1(62.48,57.78) v1(62.48,57.78) v1(62.87,9.14) v1(62.87,9.14) v1(66.55,9.4) v1(66.55,9.4) v1(69.34,61.85) v1(69.34,61.85) v1(69.34,58.04) v1(69.34,58.04) v1(69.34,54.23) v1(69.34,54.23) v1(69.34,50.42) v1(69.34,50.42) v1(69.34,46.61) v1(69.34,46.61) v1(69.34,42.8) v1(69.34,42.8) v1(69.34,38.99) v1(69.34,38.99) v1(69.34,35.18) v1(69.34,35.18) v1(69.34,31.37) v1(69.34,31.37) v1(69.34,27.56) v1(69.34,27.56) v1(69.34,23.75) v1(69.34,23.75) v1(69.34,19.94) v1(69.34,19.94) v1(69.34,16.13) v1(69.34,16.13) v1(69.34,12.06) v1(69.34,12.06) v1(69.34,8.51) v1(69.34,8.51)
PVCC18: length 6.8
  TOP w0.178: 34.29,46.35 34.2,46.27 U1.59
  TOP w0.406: 34.29,46.35 34.29,46.38 34.91,47 C51.1
  TOP w0.457: v1(37.19,46.94) 36.45,46.94 C52.1 C51.1
  BOTTOM w0.457: FB9.1 37.22,49.52 C50.1 37.19,47.88 v1(37.19,46.94)
VCC33: length 4
  TOP w0.203: U1.64 32.2,46.92 v1(32,47.12) ; v1(26.54,35.69) 26.92,35.69 27.4,36.16 U1.20
  BOTTOM w0.457: v1(32,47.12) 31.88,46.99 C31.1
VCC33_TTL: length 6.2
  TOP w0.254: U1.36 33.8,37.23 v1(34.04,37.47) ; U1.57 35.86,44.6 36.04,44.78 v1(36.04,45.29)
  BOTTOM w0.406: v1(36.04,45.29) 35.43,45.29 C33.1
  BOTTOM w0.508: v1(34.04,37.47) 34.04,37.47 C32.1 34.04,35.7 ; C34.1 34.04,35.7 ; 34.04,35.7 FB8.2
VCC33_VTERM: length 2.4
  TOP w0.178: U1.4 25.62,43.4 v1(25.4,43.18) ; v1(25.4,40.77) 25.63,41 U1.10
VCCA18: length 1.9
  TOP w0.254: v1(25.65,44.83) 25.88,44.6 U1.1 ; v1(27.43,39.8) U1.13
VCCA33: length 4.4
  TOP w0.203: v1(32.49,44.6) 32.7,44.6 33,44.91 U1.62
  TOP w0.254: v1(27.56,42.42) 27.34,42.2 U1.7
  BOTTOM w0.457: v1(32.49,44.6) 33.02,45.14 C40.1
  BOTTOM w0.508: C39.1 v1(27.56,42.42) C38.1
  vias: v1(19.18,34.92) v1(20.07,34.92) v1(20.07,34.92) v1(20.07,34.92) v1(20.07,34.92) v1(20.07,34.92)
VDD18: length 4.7
  TOP w0.178: U1.72 29,46.22 29.21,46.43 v1(29.21,46.41) ; U1.67 31,46.01 v1(30.63,46.38)
  TOP w0.203: v1(34.59,44.58) 34.6,45.1 U1.58
  TOP w0.254: U1.25 v1(29.4,37.39)
  BOTTOM w0.457: v1(34.59,44.58) 34.6,44.58 34.29,44.89 C41.1
VDD33: length 6.7
  TOP w0.406: U4.9 v1(20.7,58.56) 19.93,58.56 C16.1 ; v1(30.73,61.34) R65.1 ; v1(18.8,59.94) R75.1
  TOP w0.457: v1(23.62,56.26) R73.1 ; v1(28.32,56.26) R74.1
  BOTTOM w0.457: v1(34.67,20.45) v1(35.31,20.45) 36.32,20.45 FB10.1
  vias: v1(20.7,25.78) v1(20.7,24.77) v1(21.59,25.78) v1(21.59,24.77) v1(47.5,10.92) v1(48.51,10.92) v1(48.51,10.92) v1(48.51,10.92) v1(48.51,10.92) v1(48.51,10.92) v1(48.51,10.92) v1(48.51,10.92) v1(48.51,10.92) v1(48.51,10.92) v1(48.51,10.92)
AUDIO_3V3: length 3.5
  TOP w0.406: U2.9 34.87,17.26 v1(35.43,17.27)
  BOTTOM w0.406: FB10.2 36.33,18.66 C25.2 v1(35.43,17.27)
AUDIO_L: length 11.8
  TOP w0.178: v1(38.99,10.16) 37.5,10.16 CN2.1
  TOP w0.254: CN2.2 30.99,10.15 32.52,11.68 35.56,11.68 37.09,10.15 CN2.1
  BOTTOM w0.178: v1(38.99,10.16) C14.2 R76.2
AUDIO_R: length 10.4
  TOP w0.178: v1(29.08,6.6) 30.5,6.6 CN2.4
  TOP w0.254: CN2.4 CN2.3
  BOTTOM w0.178: v1(29.08,6.6) C8.2 R66.2
D0: length 39
  TOP w0.152: R32.1 44.7,44.45 46.35,46.1 46.35,51.05 48.64,53.34 50.42,53.34 arc(50.78,53.49) 50.93,53.85 50.93,55.5 arc(50.99,55.66) 51.16,55.72 51.31,55.72 arc(51.47,55.66) 51.54,55.5 51.54,53.43 arc(51.6,53.26) 51.77,53.2 51.92,53.2 arc(52.08,53.26) 52.15,53.43 52.15,55.5 arc(52.21,55.66) 52.37,55.72 65.02,55.72 65.66,56.36 65.66,58.12 J1.2
D1: length 42.3
  TOP w0.152: J1.6 65.58,52.96 63.59,52.96 61.79,54.76 57.15,54.76 56.36,53.98 56.36,52.55 arc(56.29,52.39) 56.13,52.32 55.98,52.32 arc(55.82,52.39) 55.75,52.55 55.75,54.16 arc(55.69,54.32) 55.52,54.39 55.37,54.39 arc(55.21,54.32) 55.14,54.16 55.14,52.55 arc(55.08,52.39) 54.91,52.32 54.76,52.32 arc(54.6,52.39) 54.53,52.55 54.53,54.16 arc(54.47,54.32) 54.3,54.39 54.15,54.39 arc(53.99,54.32) 53.92,54.16 53.92,52.55 arc(53.86,52.39) 53.69,52.32 48.9,52.32 47.24,50.67 47.24,45.97 44.83,43.56 R33.1
D2: length 40
  TOP w0.152: J1.7 63.94,51.32 62.06,51.32 61.26,52.12 61.26,53.61 arc(61.19,53.77) 61.03,53.83 60.88,53.83 arc(60.72,53.77) 60.65,53.61 60.65,51.55 arc(60.58,51.39) 60.42,51.32 60.27,51.32 arc(60.11,51.39) 60.04,51.55 60.04,53.61 arc(59.97,53.77) 59.81,53.83 59.66,53.83 arc(59.5,53.77) 59.43,53.61 59.43,51.55 arc(59.36,51.39) 59.2,51.32 59.05,51.32 arc(58.89,51.39) 58.82,51.55 58.82,53.61 arc(58.75,53.77) 58.59,53.83 58.44,53.83 arc(58.28,53.77) 58.21,53.61 58.21,52.2 57.19,51.18 49.15,51.18 48.13,50.16 48.13,45.85 44.96,42.67 R35.1
D3: length 41.7
  TOP w0.152: J1.8 65.45,50.29 52.48,50.29 arc(52.12,50.14) 51.97,49.78 51.97,47.63 arc(51.9,47.47) 51.74,47.4 51.59,47.4 arc(51.43,47.47) 51.36,47.63 51.36,49.88 arc(51.29,50.04) 51.13,50.11 50.98,50.11 arc(50.82,50.04) 50.75,49.88 50.75,47.63 arc(50.68,47.47) 50.52,47.4 50.37,47.4 arc(50.21,47.47) 50.14,47.63 50.14,49.88 arc(50.07,50.04) 49.91,50.11 49.76,50.11 arc(49.6,50.04) 49.53,49.88 49.53,46.1 45.21,41.78 R36.1
D4: length 39.7
  TOP w0.152: J1.9 58.2,49.15 57.31,48.26 57.31,46.72 arc(57.24,46.56) 57.08,46.49 56.93,46.49 arc(56.77,46.56) 56.7,46.72 56.7,48.91 arc(56.63,49.07) 56.47,49.14 56.32,49.14 arc(56.16,49.07) 56.09,48.91 56.09,46.72 arc(56.03,46.56) 55.86,46.49 55.71,46.49 arc(55.55,46.56) 55.48,46.72 55.48,48.91 arc(55.42,49.07) 55.25,49.14 55.1,49.14 arc(54.94,49.07) 54.87,48.91 54.87,46.72 arc(54.81,46.56) 54.64,46.49 54.49,46.49 arc(54.33,46.56) 54.26,46.72 54.26,48.91 arc(54.2,49.07) 54.03,49.14 53.88,49.14 arc(53.72,49.07) 53.65,48.91 53.65,46.71 arc(53.59,46.55) 53.43,46.48 51.05,46.48 45.47,40.89 R37.1
D5: length 41.7
  TOP w0.152: J1.10 65.71,48.01 64.01,48.01 62.61,46.61 62.28,46.61 arc(62.1,46.68) 62.03,46.86 62.03,47.72 arc(61.96,47.89) 61.8,47.95 61.65,47.95 arc(61.48,47.89) 61.42,47.72 61.42,45.48 arc(61.35,45.32) 61.19,45.25 61.04,45.25 arc(60.87,45.32) 60.81,45.48 60.81,47.72 arc(60.74,47.89) 60.58,47.95 60.43,47.95 arc(60.26,47.89) 60.2,47.72 60.2,45.48 arc(60.13,45.32) 59.97,45.25 59.82,45.25 arc(59.66,45.32) 59.59,45.48 59.59,47.72 arc(59.52,47.89) 59.36,47.95 59.21,47.95 arc(59.05,47.89) 58.98,47.72 58.98,46.35 58.09,45.47 51.18,45.47 45.72,40.01 R38.1
D6: length 39.9
  TOP w0.152: J1.13 57.19,44.07 56.41,43.28 56.41,42.14 arc(56.34,41.97) 56.18,41.91 56.02,41.91 arc(55.86,41.97) 55.8,42.14 55.8,44.09 arc(55.73,44.26) 55.57,44.32 55.41,44.32 arc(55.25,44.26) 55.19,44.09 55.19,42.14 arc(55.12,41.97) 54.96,41.91 54.81,41.91 arc(54.64,41.97) 54.58,42.14 54.58,44.09 arc(54.51,44.26) 54.35,44.32 54.2,44.32 arc(54.03,44.26) 53.97,44.09 53.97,42.14 arc(53.9,41.97) 53.74,41.91 53.59,41.91 arc(53.42,41.97) 53.36,42.14 53.36,44.09 arc(53.29,44.26) 53.13,44.32 52.98,44.32 arc(52.81,44.26) 52.75,44.09 52.75,42.14 arc(52.68,41.97) 52.52,41.91 52.37,41.91 arc(52.21,41.97) 52.14,42.14 52.14,44.09 arc(52.07,44.26) 51.91,44.32 51.19,44.32 50.81,43.94 45.97,39.12 R39.1
D7: length 41.8
  TOP w0.152: J1.14 65.58,42.8 62.41,42.8 arc(62.25,42.73) 62.18,42.57 62.18,41.03 arc(62.11,40.87) 61.95,40.8 61.8,40.8 arc(61.64,40.87) 61.57,41.03 61.57,42.97 arc(61.5,43.13) 61.34,43.19 61.19,43.19 arc(61.03,43.13) 60.96,42.97 60.96,41.03 arc(60.89,40.87) 60.73,40.8 60.58,40.8 arc(60.42,40.87) 60.35,41.03 60.35,42.97 arc(60.28,43.13) 60.12,43.19 59.97,43.19 arc(59.81,43.13) 59.74,42.97 59.74,41.03 arc(59.67,40.87) 59.51,40.8 59.36,40.8 arc(59.2,40.87) 59.13,41.03 59.13,42.97 arc(59.06,43.13) 58.9,43.19 58.75,43.19 arc(58.59,43.13) 58.52,42.97 58.52,41.13 arc(58.45,40.97) 58.29,40.9 48.9,40.9 46.23,38.23 R40.1
D8: length 39.8
  TOP w0.152: R41.1 46.61,37.34 48.01,38.73 49.02,38.73 arc(49.22,38.65) 49.3,38.45 49.3,38.02 arc(49.37,37.85) 49.53,37.79 49.68,37.79 arc(49.84,37.85) 49.91,38.02 49.91,39.67 arc(49.98,39.83) 50.14,39.9 50.29,39.9 arc(50.45,39.83) 50.52,39.67 50.52,38.02 arc(50.59,37.85) 50.75,37.79 50.9,37.79 arc(51.06,37.85) 51.13,38.02 51.13,39.67 arc(51.2,39.83) 51.36,39.9 51.51,39.9 arc(51.67,39.83) 51.74,39.67 51.74,38.02 arc(51.81,37.85) 51.97,37.79 52.12,37.79 arc(52.28,37.85) 52.35,38.02 52.35,39.67 arc(52.42,39.83) 52.58,39.9 52.73,39.9 arc(52.89,39.83) 52.96,39.67 52.96,38.02 arc(53.03,37.85) 53.19,37.79 53.34,37.79 arc(53.5,37.85) 53.57,38.02 53.57,39.67 arc(53.64,39.83) 53.8,39.9 53.95,39.9 arc(54.11,39.83) 54.18,39.67 54.18,38.02 arc(54.25,37.85) 54.41,37.79 54.56,37.79 arc(54.72,37.85) 54.79,38.02 54.79,39.52 arc(54.86,39.68) 55.02,39.75 62.53,39.75 J1.15
D9: length 41.7
  TOP w0.152: J1.16 65.45,40.13 63.86,40.13 62.48,38.76 61.52,38.76 arc(61.36,38.69) 61.29,38.53 61.29,37.08 arc(61.22,36.92) 61.06,36.85 60.91,36.85 arc(60.75,36.92) 60.68,37.08 60.68,38.53 arc(60.61,38.69) 60.45,38.76 60.3,38.76 arc(60.14,38.69) 60.07,38.53 60.07,37.08 arc(60,36.92) 59.84,36.85 59.69,36.85 arc(59.53,36.92) 59.46,37.08 59.46,38.53 arc(59.39,38.69) 59.23,38.76 59.08,38.76 arc(58.92,38.69) 58.85,38.53 58.85,37.08 arc(58.78,36.92) 58.62,36.85 58.47,36.85 arc(58.31,36.92) 58.24,37.08 58.24,38.53 arc(58.18,38.69) 58.01,38.76 57.86,38.76 arc(57.7,38.69) 57.63,38.53 57.63,37.08 arc(57.57,36.92) 57.4,36.85 57.25,36.85 arc(57.09,36.92) 57.02,37.08 57.02,38.53 arc(56.96,38.69) 56.79,38.76 56.64,38.76 arc(56.48,38.69) 56.41,38.53 56.41,37.62 55.63,36.83 48.01,36.83 47.62,36.45 R42.1
D10: length 39.7
  TOP w0.152: R44.1 49.15,35.56 50.16,34.54 52.11,34.54 52.11,35.67 arc(52.18,35.83) 52.34,35.9 52.49,35.9 arc(52.65,35.83) 52.72,35.67 52.72,33.92 arc(52.79,33.76) 52.95,33.69 53.1,33.69 arc(53.26,33.76) 53.33,33.92 53.33,35.67 arc(53.4,35.83) 53.56,35.9 53.71,35.9 arc(53.87,35.83) 53.94,35.67 53.94,33.92 arc(54.01,33.76) 54.17,33.69 54.32,33.69 arc(54.48,33.76) 54.55,33.92 54.55,35.67 arc(54.62,35.83) 54.78,35.9 54.93,35.9 arc(55.09,35.83) 55.16,35.67 55.16,33.92 arc(55.23,33.76) 55.39,33.69 55.54,33.69 arc(55.7,33.76) 55.77,33.92 55.77,35.67 arc(55.84,35.83) 56,35.9 56.15,35.9 arc(56.31,35.83) 56.38,35.67 56.38,33.92 arc(56.45,33.76) 56.61,33.69 56.76,33.69 arc(56.92,33.76) 56.99,33.92 56.99,35.62 arc(57.05,35.78) 57.22,35.85 61.17,35.85 J1.17
D11: length 41.5
  TOP w0.152: J1.20 65.62,35.22 63.46,35.22 62.15,33.91 62.15,32.71 arc(62.09,32.54) 61.93,32.48 61.77,32.48 arc(61.61,32.54) 61.55,32.71 61.55,34.61 arc(61.48,34.77) 61.32,34.83 61.16,34.83 arc(61,34.77) 60.94,34.61 60.94,32.71 arc(60.87,32.54) 60.71,32.48 60.55,32.48 arc(60.39,32.54) 60.33,32.71 60.33,34.61 arc(60.26,34.77) 60.1,34.83 59.95,34.83 arc(59.78,34.77) 59.72,34.61 59.72,32.71 arc(59.65,32.54) 59.49,32.48 59.34,32.48 arc(59.17,32.54) 59.11,32.71 59.11,34.61 arc(59.04,34.77) 58.88,34.83 58.73,34.83 arc(58.56,34.77) 58.5,34.61 58.5,32.74 arc(58.43,32.58) 58.27,32.51 50.29,32.51 48.13,34.67 R45.1
D12: length 38.9
  TOP w0.152: J1.22 65.58,32.64 63.62,32.64 62.36,31.37 55.4,31.37 arc(55.24,31.31) 55.17,31.15 55.17,28.66 arc(55.11,28.5) 54.94,28.43 54.79,28.43 arc(54.63,28.5) 54.56,28.66 54.56,31.17 arc(54.5,31.33) 54.33,31.39 54.18,31.39 arc(54.02,31.33) 53.95,31.17 53.95,28.66 arc(53.89,28.5) 53.72,28.43 53.57,28.43 arc(53.41,28.5) 53.34,28.66 53.34,31.17 arc(53.28,31.33) 53.12,31.39 52.96,31.39 arc(52.8,31.33) 52.73,31.17 52.73,29.44 51.71,29.44 47.37,33.78 R46.1
D13: length 40.4
  TOP w0.152: R48.1 46.23,32.89 51.56,27.56 56.75,27.56 arc(56.91,27.63) 56.97,27.79 56.97,30.11 arc(57.04,30.27) 57.2,30.34 57.35,30.34 arc(57.52,30.27) 57.58,30.11 57.58,27.72 arc(57.65,27.55) 57.81,27.49 57.96,27.49 arc(58.13,27.55) 58.19,27.72 58.19,30.11 arc(58.26,30.27) 58.42,30.34 58.57,30.34 arc(58.74,30.27) 58.8,30.11 58.8,27.72 arc(58.87,27.55) 59.03,27.49 59.18,27.49 arc(59.35,27.55) 59.41,27.72 59.41,30.11 arc(59.48,30.27) 59.64,30.34 59.79,30.34 arc(59.95,30.27) 60.02,30.11 60.02,29.21 arc(60.1,29.03) 60.28,28.96 60.96,28.96 62.21,30.2 63.14,30.2 J1.23
D14: length 44.2
  TOP w0.152: J1.25 62.48,28.83 59.69,26.04 48.13,26.04 arc(47.95,26.07) 47.8,26.17 47.74,26.23 arc(47.69,26.3) 47.68,26.39 arc(47.69,26.48) 47.74,26.56 49.05,27.86 arc(49.09,27.93) 49.11,28.02 arc(49.09,28.11) 49.05,28.18 48.94,28.29 arc(48.78,28.36) 48.61,28.29 47.04,26.72 arc(46.88,26.65) 46.72,26.72 46.61,26.83 arc(46.56,26.9) 46.55,26.99 arc(46.56,27.08) 46.61,27.15 48.18,28.72 arc(48.23,28.8) 48.25,28.88 arc(48.23,28.97) 48.18,29.04 48.08,29.15 arc(47.91,29.22) 47.75,29.15 46.18,27.58 arc(46.02,27.52) 45.86,27.58 45.75,27.69 arc(45.7,27.76) 45.68,27.85 arc(45.7,27.94) 45.75,28.01 47.14,29.4 arc(47.19,29.48) 47.21,29.57 arc(47.19,29.65) 47.14,29.73 45.12,31.75 39.5,31.75 R64.2
D15: length 41.7
  TOP w0.152: J1.26 65.58,27.56 62.74,27.56 59.94,24.77 46.74,24.77 43.6,27.9 45.05,29.35 arc(45.1,29.43) 45.12,29.51 arc(45.1,29.6) 45.05,29.68 44.94,29.78 arc(44.78,29.85) 44.62,29.78 42.99,28.15 arc(42.82,28.08) 42.66,28.15 42.56,28.26 arc(42.51,28.33) 42.49,28.42 arc(42.51,28.51) 42.56,28.58 44.19,30.21 arc(44.24,30.29) 44.26,30.38 arc(44.24,30.46) 44.19,30.54 43.86,30.86 39.05,30.86 R63.2
D16: length 43.5
  TOP w0.152: R62.2 46.46,22.24 arc(46.62,22.14) 46.81,22.1 46.99,22.1 arc(47.19,22.18) 47.27,22.38 47.27,23.39 arc(47.34,23.55) 47.5,23.61 47.65,23.61 arc(47.81,23.55) 47.88,23.39 47.88,21.58 arc(47.95,21.42) 48.11,21.35 48.26,21.35 arc(48.42,21.42) 48.49,21.58 48.49,23.39 arc(48.56,23.55) 48.72,23.61 48.87,23.61 arc(49.03,23.55) 49.1,23.39 49.1,21.58 arc(49.17,21.42) 49.33,21.35 49.48,21.35 arc(49.64,21.42) 49.71,21.58 49.71,23.39 arc(49.78,23.55) 49.94,23.61 60.33,23.61 63,26.29 J1.27
D17: length 41.6
  TOP w0.152: R61.2 47.18,20.26 51.05,20.26 arc(51.22,20.33) 51.28,20.49 51.28,22.2 arc(51.35,22.37) 51.51,22.43 51.66,22.43 arc(51.83,22.37) 51.89,22.2 51.89,20.46 arc(51.96,20.3) 52.12,20.23 52.27,20.23 arc(52.43,20.3) 52.5,20.46 52.5,21.72 53.21,22.43 60.71,22.43 63.29,25.02 65.58,25.02 J1.28
D18: length 42.1
  TOP w0.152: J1.31 56.89,21.21 arc(56.72,21.13) 56.64,20.95 56.64,19.26 arc(56.57,19.1) 56.41,19.03 56.26,19.03 arc(56.1,19.1) 56.03,19.26 56.03,21.03 arc(55.96,21.2) 55.8,21.26 55.65,21.26 arc(55.49,21.2) 55.42,21.03 55.42,19.26 arc(55.35,19.1) 55.19,19.03 55.04,19.03 arc(54.88,19.1) 54.81,19.26 54.81,19.74 arc(54.72,19.97) 54.48,20.07 54.39,20.07 arc(54.12,20.01) 53.9,19.87 53.09,19.05 47.12,19.05 R60.2
D19: length 39.5
  TOP w0.152: R59.2 46.99,17.91 52.64,17.91 52.64,17.91 57.02,17.91 58.11,19 arc(58.31,19.13) 58.55,19.18 58.6,19.18 arc(58.78,19.1) 58.85,18.92 58.85,18.4 arc(58.92,18.24) 59.08,18.17 59.23,18.17 arc(59.39,18.24) 59.46,18.4 59.46,19.84 arc(59.53,20) 59.69,20.07 64.64,20.07 65.79,21.21 J1.32
D20: length 41.3
  TOP w0.152: J1.33 62.41,18.67 arc(62.25,18.6) 62.18,18.44 62.18,17.47 arc(62.11,17.31) 61.95,17.25 61.8,17.25 arc(61.64,17.31) 61.57,17.47 61.57,18.76 arc(61.5,18.92) 61.34,18.99 61.19,18.99 arc(61.03,18.92) 60.96,18.76 60.96,17.14 arc(60.85,16.88) 60.58,16.76 46.86,16.76 R58.2
D21: length 38.8
  TOP w0.152: R57.2 46.49,15.88 62.1,15.88 63.63,17.4 65.58,17.4 J1.34
D22: length 41.1
  TOP w0.152: R56.2 46.25,14.86 65.58,14.86 66.85,16.13
D23: length 37.3
  TOP w0.152: J1.37 63.67,12.95 62.74,12.95 61.72,13.97 45.89,13.97 R55.2
DE: length 44.6
  TOP w0.178: R31.1 44.83,45.72 44.96,45.74 v1(44.96,45.72)
  BOTTOM w0.178: J1.39 63.25,11.05 44.96,29.34 v1(44.96,45.72)
GPIO15: length 4.1
  TOP w0.178: TP1.1 32.6,47.28 U1.63
HDCP_M_SCL: length 13.8
  TOP w0.178: v1(18.16,31.11) 19.18,31.11 25.86,37.8 U1.18
  BOTTOM w0.178: R70.2 U3.6 v1(18.16,31.11)
HDCP_M_SDA: length 13.4
  TOP w0.178: v1(18.16,32.38) 19.81,32.38 25.63,38.2 U1.17
  BOTTOM w0.178: R71.2 U3.5 v1(18.16,32.38)
HDMI_5V: length 10.3
  TOP w0.381: v1(12.19,47.5) 12.19,47.5 CN1.18
  TOP w0.406: v1(12.19,54.36) 12.2,54.36 R24.1
  BOTTOM w0.406: v1(12.19,54.36) v1(12.19,47.5) 12.19,46.6 R1.1
HDMI_5V_DET: length 34.2
  TOP w0.178: R24.2 R34.1 13.21,56.26 ; U4.1 20.57,63.76 20.57,63.75 v1(20.7,63.75) ; 13.21,56.26 v1(13.21,57.15) ; 13.21,56.26 18.92,56.26 28.6,46.58 U1.73
  BOTTOM w0.178: v1(13.21,57.15) 19.81,63.75 v1(20.7,63.75)
HS: length 47.6
  TOP w0.178: R30.1 v1(44.83,46.86)
  BOTTOM w0.178: J1.38 65.58,12.32 62.99,12.32 45.72,29.59 45.72,45.97 v1(44.83,46.86)
IIS_MCLK: length 34.5
  TOP w0.178: R52.2 26.8,26.54 32.51,20.83 32.51,18.41 30.36,16.26 U2.4 29.25,16.27 28.47,16.27 27.94,15.75 27.94,8.13 22.73,2.92
IIS_SCLK: length 38.3
  TOP w0.178: 17.65,2.92 19.43,4.7 22.99,4.7 26.92,8.64 26.92,16.13 28.06,17.26 U2.2 30.09,17.26 31.37,18.54 31.37,20.95 25.65,26.67 R51.2
IIS_SD0: length 71.3
  TOP w0.178: R90.2 23.37,26.8 30.1,20.07 30.1,17.91 29.96,17.76 U2.1 27.8,17.76 26.42,16.38 26.42,8.89 22.73,5.21 17.4,5.21 15.11,2.92
  BOTTOM w0.178: 15.11,2.92 16.26,1.78 36.31,1.78 R91.2
IIS_WS: length 37.9
  TOP w0.178: R50.2 24.51,26.67 30.73,20.45 v1(30.73,18.8) ; 20.19,2.92 21.46,4.19 23.24,4.19 27.43,8.38 27.43,15.94 28.26,16.77 29.25,16.77 U2.3 30.23,16.76 32,18.54 v1(32,18.8)
  BOTTOM w0.178: v1(30.73,18.8) v1(32,18.8)
NRST: length 39.4
  TOP w0.178: v1(23.11,61.85) 22.47,61.81 U4.4 20.03,61.81 C13.1 R75.2 18.92,61.84 J3.4 ; 44.96,64.14 K1.1 ; 44.96,64.14 K1.2 ; 44.96,64.14 v1(43.56,64.14)
  BOTTOM w0.178: v1(43.56,64.14) 41.27,61.85 v1(23.11,61.85)
PCLK: length 31
  TOP w0.178: R28.1 v1(38.91,46.28) 48.86,56.23 arc(49.46,56.63) 50.16,56.77 J1.3
  BOTTOM w0.178: R28.1 v1(38.91,46.28)
RESET_N: length 52.3
  TOP w0.178: U4.13 28.47,59.21 28.83,59.56 29.59,59.56 C5.1 R65.2 30.73,59.56 v1(31.5,59.56) ; U1.24 29,34.04 27.69,32.72 v1(27.69,31.57)
  POWER w0.178: v1(40.39,54.23) 40.39,37.8 34.16,31.57 v1(27.69,31.57)
  BOTTOM w0.178: v1(40.39,54.23) 35.05,59.56 v1(31.5,59.56)
RX_CLK+: length 16.2
  TOP w0.178: U1.3 26.09,43.8 26.04,43.85 16.05,43.85 arc(15.96,43.83) 15.88,43.78 15.86,43.76 T5.4 T5.7 14.48,43.76 14.47,43.77 arc(14.38,43.83) 14.27,43.85 12.57,43.85 arc(12.42,43.82) 12.3,43.73 12.24,43.68 arc(12.05,43.55) 11.81,43.5 CN1.10
RX_CLK-: length 16.2
  TOP w0.178: U1.2 26.09,44.2 26.04,44.15 16.09,44.15 arc(15.96,44.18) 15.85,44.25 15.85,44.26 T5.5 T5.6 14.48,44.26 14.47,44.25 arc(14.36,44.18) 14.23,44.15 12.66,44.15 arc(12.43,44.2) 12.24,44.33 12.23,44.34 arc(12.05,44.46) 11.84,44.5 CN1.12
RX_D0+: length 16.2
  TOP w0.178: CN1.7 11.71,42 arc(11.95,42.05) 12.15,42.18 12.18,42.22 arc(12.33,42.31) 12.5,42.35 14.27,42.35 arc(14.38,42.33) 14.47,42.27 14.48,42.26 T5.10 T5.1 15.85,42.26 15.85,42.26 arc(15.96,42.33) 16.08,42.35 25.44,42.35 arc(25.66,42.4) 25.85,42.52 25.86,42.54 arc(25.93,42.58) 26.01,42.6 U1.6
RX_D0-: length 16.2
  TOP w0.178: CN1.9 11.74,43 arc(11.95,42.96) 12.12,42.84 12.15,42.81 arc(12.33,42.69) 12.54,42.65 14.25,42.65 arc(14.36,42.68) 14.46,42.74 14.48,42.76 T5.9 T5.2 15.85,42.76 15.87,42.73 arc(15.96,42.68) 16.05,42.66 25.43,42.66 arc(25.54,42.68) 25.64,42.75 25.64,42.75 arc(25.92,42.94) 26.24,43 U1.5
RX_D1+: length 16.4
  TOP w0.178: CN1.4 11.73,40.5 arc(11.95,40.54) 12.13,40.66 12.2,40.74 arc(12.32,40.82) 12.47,40.85 14.27,40.85 arc(14.38,40.83) 14.47,40.77 14.48,40.76 T1.7 T1.4 15.88,40.76 15.9,40.78 arc(15.98,40.84) 16.08,40.86 23.13,40.86 arc(23.51,40.93) 23.84,41.15 24.03,41.34 arc(24.15,41.42) 24.3,41.45 26.04,41.45 26.08,41.4 U1.9
RX_D1-: length 16.4
  TOP w0.178: CN1.6 11.76,41.5 arc(11.96,41.46) 12.12,41.35 12.19,41.28 arc(12.33,41.19) 12.5,41.15 14.22,41.15 arc(14.36,41.18) 14.48,41.26 14.48,41.26 T1.6 T1.5 15.88,41.26 15.88,41.25 arc(15.98,41.19) 16.1,41.16 23.13,41.16 arc(23.4,41.21) 23.63,41.37 23.81,41.55 arc(24.03,41.7) 24.29,41.75 26.04,41.75 26.08,41.8 U1.8
RX_D2+: length 16.4
  TOP w0.178: CN1.1 11.73,39 arc(11.95,39.04) 12.13,39.16 12.17,39.2 arc(12.35,39.33) 12.57,39.37 14.22,39.37 arc(14.34,39.35) 14.44,39.28 14.46,39.26 T1.10 T1.1 15.88,39.26 15.88,39.27 arc(15.98,39.33) 16.1,39.36 24.56,39.36 arc(25.1,39.46) 25.56,39.77 25.87,40.08 arc(26,40.17) 26.16,40.2 U1.12
RX_D2-: length 16.4
  TOP w0.178: CN1.3 11.76,40 arc(11.95,39.96) 12.11,39.85 12.16,39.8 arc(12.3,39.71) 12.47,39.67 14.29,39.67 arc(14.39,39.69) 14.47,39.75 14.48,39.76 T1.9 T1.2 15.88,39.76 15.88,39.75 arc(15.98,39.69) 16.1,39.66 24.53,39.66 arc(24.98,39.75) 25.36,40 25.72,40.36 arc(25.98,40.54) 26.3,40.6 U1.11
RX_HPD: length 21.2
  TOP w0.178: 16.54,49.16 16.54,48.53 16,47.99 T6.5 T6.6 14.67,48 CN1.19 ; 16.54,49.16 R7.2 ; 16.54,49.16 17.78,49.16 18.23,49.6 ; 18.23,49.6 Q1.G ; 18.23,49.6 19.95,47.88 26.61,47.88 28.2,46.29 U1.74
RX_SCL: length 20.8
  TOP w0.178: U1.76 27.4,45.9 26.69,46.61 18.02,46.61 17.4,45.99 T6.1 T6.10 14.67,46 9.04,46 v1(8.76,45.72)
  BOTTOM w0.178: v1(8.76,45.72) 9.66,45.71 R5.2
RX_SDA: length 21.5
  TOP w0.178: v1(8.76,46.5) 8.79,46.55 8.94,46.5 CN1.16 14.67,46.5 T6.9 T6.2 17.27,46.49 18.03,47.24 26.67,47.24 27.8,46.11 U1.75
  BOTTOM w0.178: R6.2 9.66,46.55 8.76,46.55 v1(8.76,46.5)
S_SCL: length 32.6
  TOP w0.178: U1.66 31.4,46.39 25.78,52.01 25.78,55.87 R73.2 25.78,56.65 25.78,57.73 26.6,58.56 U4.12 32.13,58.56 35.69,62.11 35.69,66.67 J4.2
S_SDA: length 32.6
  TOP w0.178: U1.65 31.8,46.57 26.29,52.08 26.29,56 R74.2 26.21,56.6 26.21,57.56 26.56,57.91 U4.11 32.26,57.91 36.2,61.84 36.2,66.67 J4.1
SPDIF: length 23.3
  BOTTOM w0.178: CN3.3 43.99,9.4 43.98,9.39 R91.1 42.93,9.4 42.92,9.4 35.94,2.41 25.78,2.41 J5.1
SWIM/TICECLK: length 11.9
  TOP w0.178: J3.3 22.61,68.83 24.77,68.83 25.27,68.33 25.27,63.88 26.7,62.46 U4.18
TICEDAT: length 9.7
  TOP w0.178: J3.2 24,60.73 22.48,59.21 U4.8
UART_TX1: length 9.6
  TOP w0.178: v1(22.99,63.37) 22.72,63.11 U4.2
  BOTTOM w0.178: 29.59,67.69 25.27,63.37 v1(22.99,63.37)
VS: length 51
  TOP w0.178: v1(44.45,48.01) 44.39,47.94 44.32,48.01 R29.1
  BOTTOM w0.178: v1(44.45,48.01) 44.2,47.75 44.2,29.08 63.5,9.78 65.58,9.78 J1.40
N10971009: length 4.5
  BOTTOM w0.356: 12.06,45.48 12.06,43.81 D1.2 ; 12.06,45.48 R1.2 ; 12.06,45.48 10.66,45.48 ; 10.66,45.48 R6.1 ; 10.66,45.48 R5.1
N10976855: length 1.5
  TOP w0.178: R8.1 19.17,52.25 Q1.D
N10992551: length 8.3
  TOP w0.152: R31.2 42.17,45.21 40.39,45.21 38.17,43 U1.53
N10992553: length 7.9
  TOP w0.152: R32.2 40.26,44.45 38.41,42.6 U1.52
N10992555: length 5.6
  TOP w0.152: R33.2 40.1,43.56 38.73,42.2 U1.51
N10992557: length 7.5
  TOP w0.152: R35.2 39.86,42.67 38.99,41.8 U1.50
N10992559: length 5.2
  TOP w0.152: R36.2 39.75,41.78 39.37,41.4 U1.49
N10992561: length 7.3
  TOP w0.152: R37.2 42.68,41 U1.48
N10992563: length 5.3
  TOP w0.152: U1.47 38.73,40.6 39.33,40.01 R38.2
N10992565: length 7.6
  TOP w0.152: R39.2 39.44,39.12 38.35,40.2 U1.46
N10992567: length 5.7
  TOP w0.152: R40.2 39.55,38.23 37.97,39.8 U1.45
N10992569: length 8
  TOP w0.152: U1.44 37.59,39.4 39.65,37.34 R41.2
N10992571: length 6.1
  TOP w0.152: U1.43 37.21,39 39.76,36.45 R42.2
N10992573: length 8.4
  TOP w0.152: U1.42 36.84,38.6 39.88,35.56 R44.2
N10992575: length 6.5
  TOP w0.152: U1.41 36.51,38.2 40.04,34.67 R45.2
N10992577: length 8.8
  TOP w0.152: R46.2 40.21,33.78 36.2,37.8 U1.40
N10992579: length 6.9
  TOP w0.152: U1.39 36.01,37.4 R48.2
N10992581: length 2.6
  TOP w0.178: R28.2 37.2,44.56 arc(36.79,44.29) 36.32,44.2 U1.56
N10992583: length 8.9
  TOP w0.152: U1.55 37.74,43.8 40.42,46.48 41.16,46.48 R29.2
N10992585: length 8.6
  TOP w0.152: U1.54 37.94,43.4 40.39,45.85 41.66,45.85 R30.2
N10993307: length 2.8
  TOP w0.152: R64.1 35.9,34.77 34.6,36.07 U1.38
N10993311: length 5.2
  TOP w0.152: R63.1 34.2,35.72 U1.37
N10993315: length 3.7
  TOP w0.152: U1.35 33.4,35.31 R62.1
N10993319: length 6.4
  TOP w0.152: U1.34 33,34.44 R61.1
N10993323: length 4.8
  TOP w0.152: U1.33 32.6,33.57 R60.1
N10993327: length 7.5
  TOP w0.152: U1.32 32.2,32.7 R59.1
N10993331: length 5.9
  TOP w0.152: U1.31 31.8,31.83 R58.1
N10993335: length 8.6
  TOP w0.152: R57.1 31.4,30.97 U1.30
N10993339: length 7
  TOP w0.152: R56.1 31,30.11 U1.29
N10993343: length 9.7
  TOP w0.152: R55.1 30.6,29.26 U1.28
N10993355: length 6.4
  TOP w0.178: R52.1 26.8,32.89 28.6,34.7 U1.23
N10993359: length 6.7
  TOP w0.178: R51.1 25.65,32.6 28.2,35.15 U1.22
N10993363: length 7
  TOP w0.178: R50.1 24.51,32.26 27.8,35.55 U1.21
N10995773: length 3.2
  TOP w0.178: U1.16 24.88,38.6 R43.2
N10999972: length 9.2
  TOP w0.178: C2.1 35.26,52.19 Y1.1 35.14,52.24 34.16,51.25 R3.2 33.8,48.79 U1.60
